# EAGLE board shapeTest5 (EAGLE 7.4.0)

Size 150 x 100 mm. Coordinates in mm from the lower left corner, seen from the top.
Outline: 0,0 0,100 150,100 150,0 0,0
Copper layers (1*16): Top 0.035mm / dielectric 1.5mm / Bottom 0.035mm
Design rules "default": minimum track width 10mil, minimum drill 0.6mm, track to track 8mil, track to pad 8mil, pad to pad 8mil, via to via 8mil, smd to smd 8mil, copper to edge 40mil, drill to drill 8mil, minimum pad ring 10mil, minimum via ring 8mil, stop-mask expansion 4mil, vias tented up to drill 0mil, thermal gap 10mil

## Footprints (pad centres in the part's own frame; a part is rotated, then mirrored left to right if it is on the bottom)
ADAFRUIT-1.2IN-8X8-LED-BACKPACK = drill 1.016 pad 1.778: GND -18.415,-1.27; SCL -18.415,3.81; SDA -18.415,1.27; VDD -18.415,-3.81

## Placement (x,y rotation side)
U1_8_DISPLAY_2  [ADAFRUIT-1.2IN-8X8-LED-BACKPACK]  75.01,39.06 270 top

## Library data of the parts
U1_8_DISPLAY_2 = BOBs; DIST: Adafruit; DISTPN: 1052; HIERARCHY_NAME: display_2.u1

## Nets
+5V_2_BRAIN: U1_8_DISPLAY_2.VDD
A4_2_BRAIN: U1_8_DISPLAY_2.SDA
A5_2_BRAIN: U1_8_DISPLAY_2.SCL
S$1: U1_8_DISPLAY_2.GND